# Altium PCB ESC_Brushless_V4.12.PcbDoc
Units mil, origin at the board's own origin, x right, y up, seen from the top; angles counter-clockwise.
Board outline 2120 x 1320.43 mil, 2 copper layers (Top Layer, Bottom Layer); 69 components, 46 nets, 252 pads, 156 vias.
Unrouted connection lines stored in the file: 33.
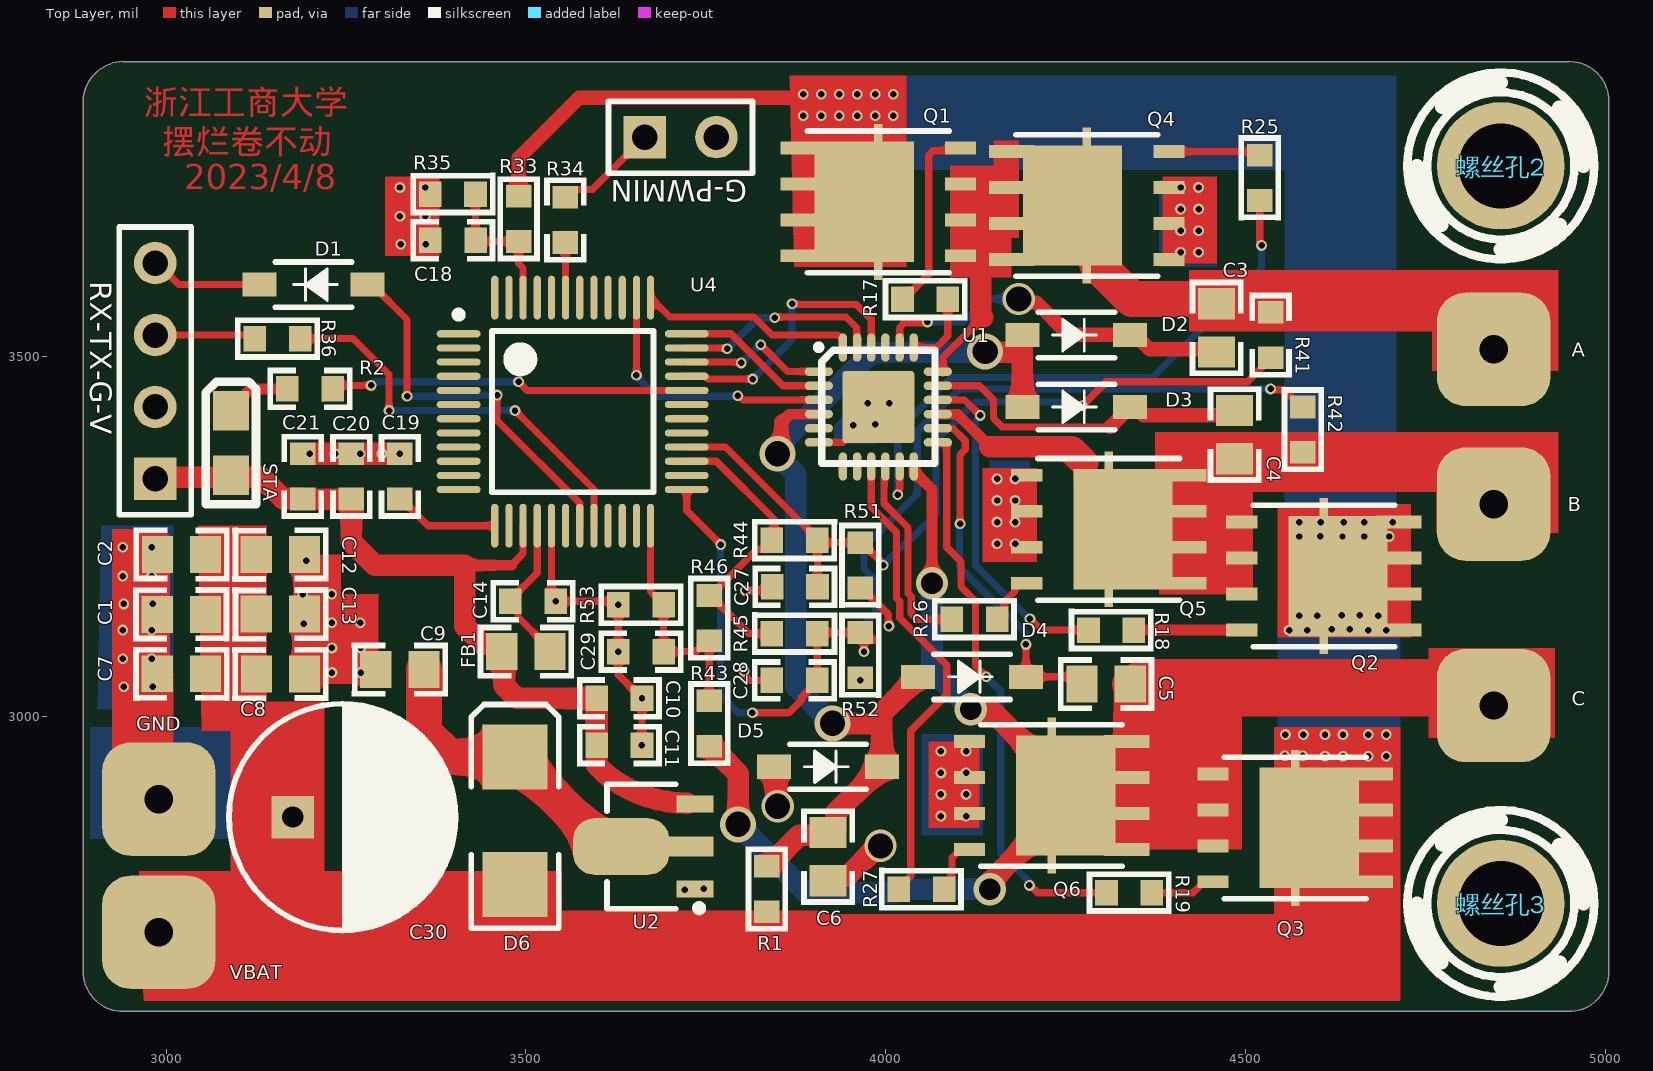
[diagram p0: Top Layer view]
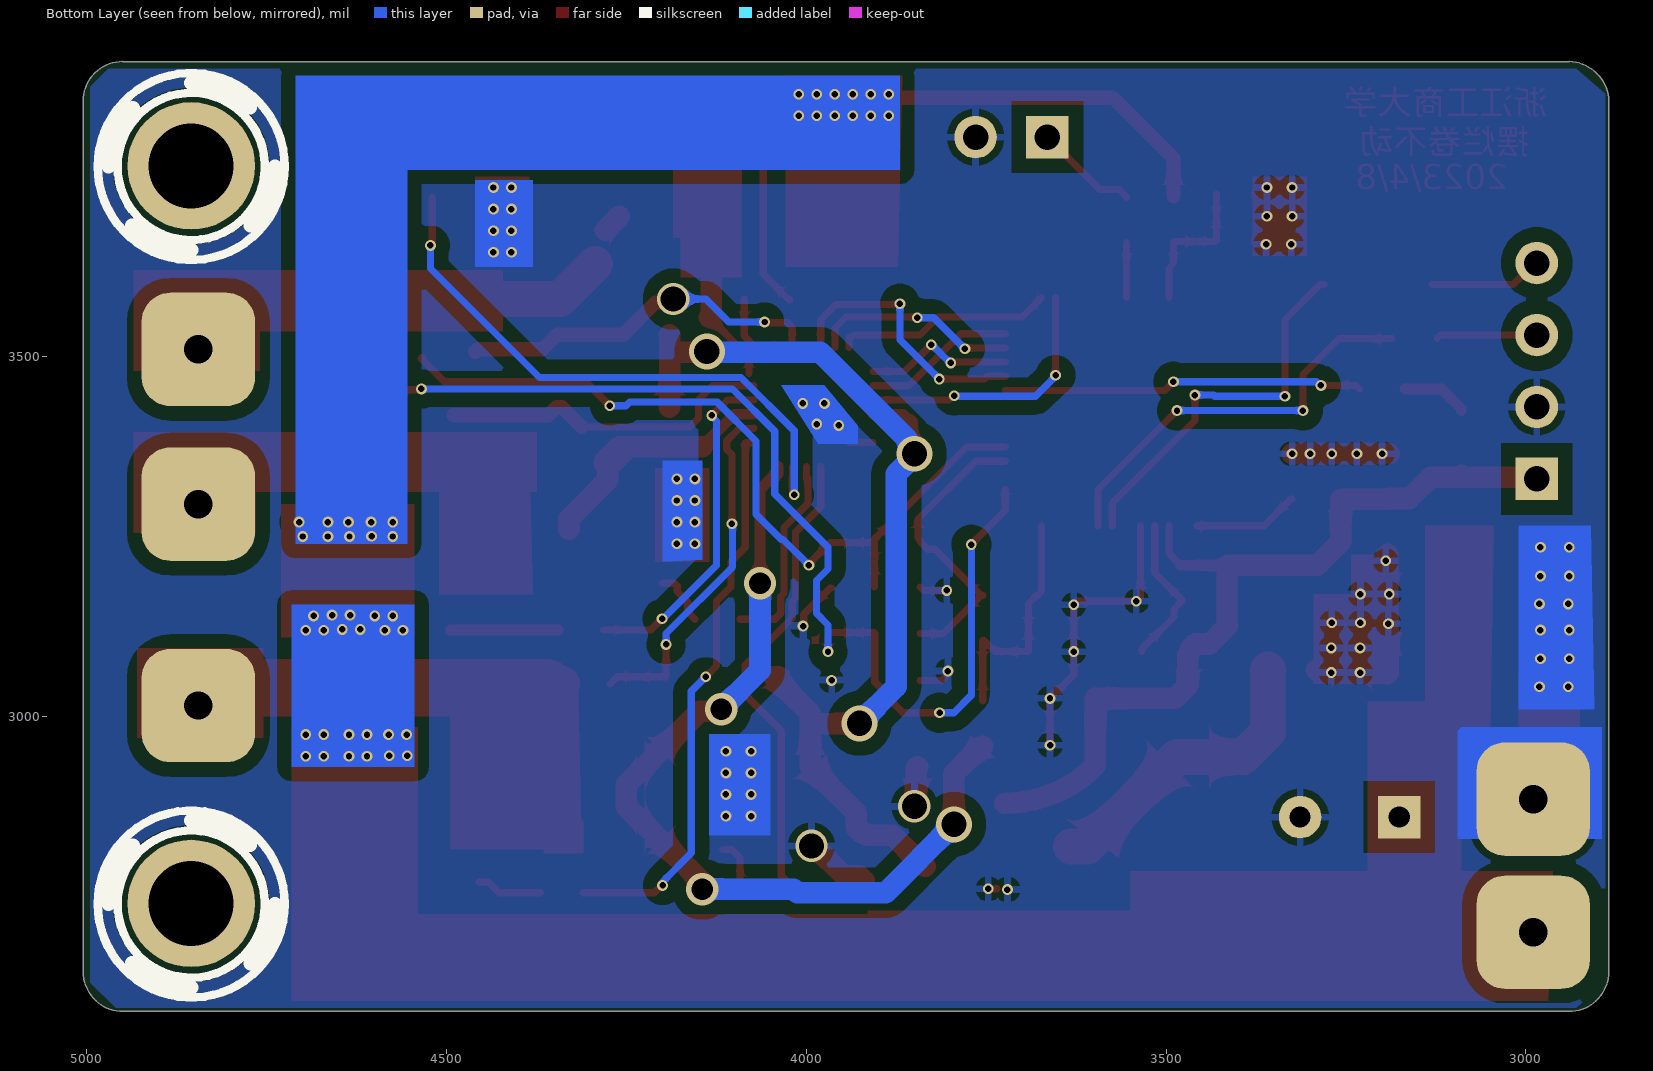
[diagram p1: Bottom Layer view, seen from below]
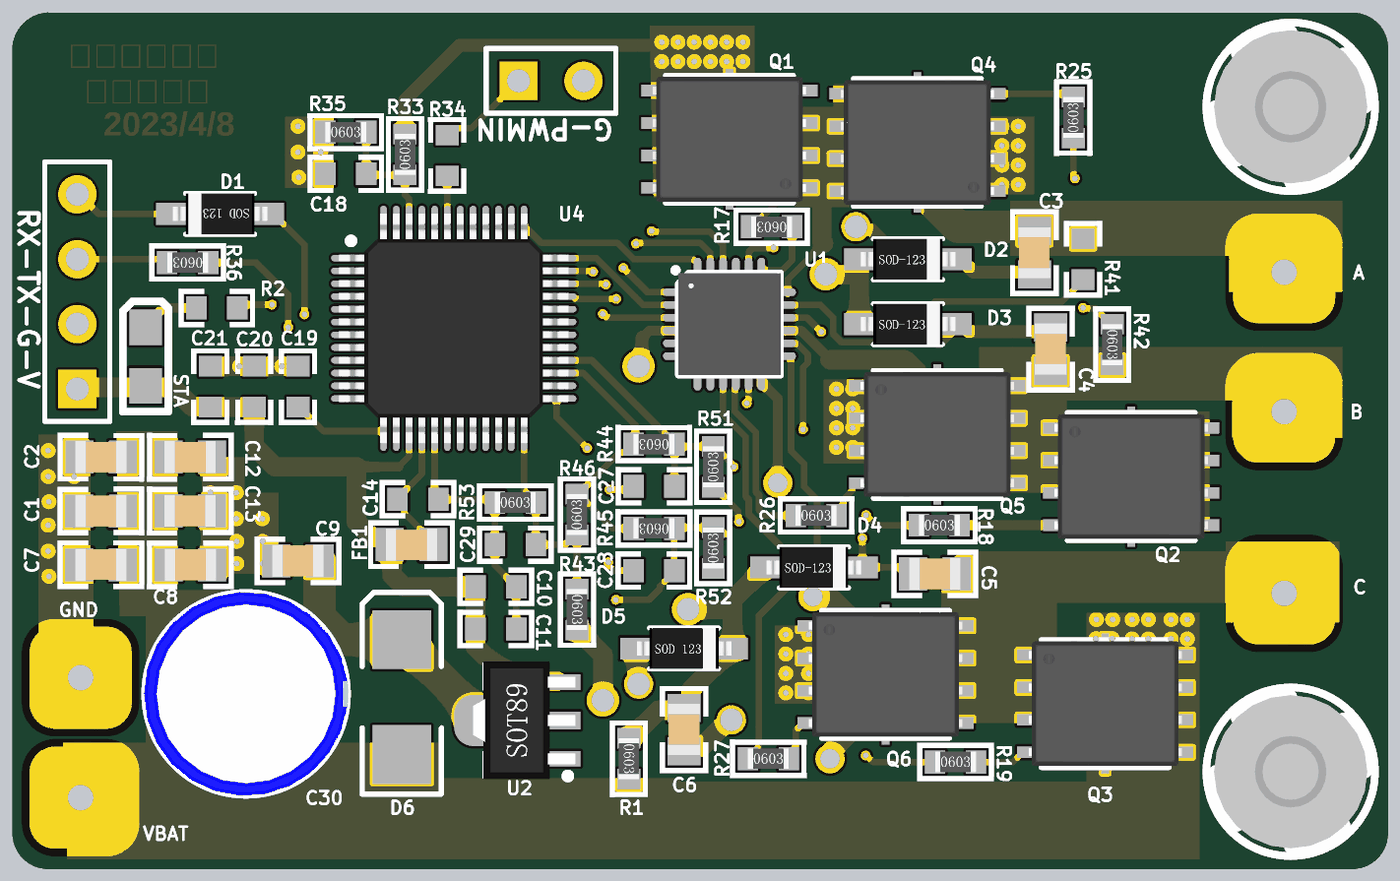
[diagram p2: 3D render of the assembled board from above, using the file's embedded part models]

## Layer stack, top to bottom
Top Solder: solder mask 0.4, Solder Resist, Dk 3.5
Top Layer: signal copper 1.4
Dielectric 1: dielectric 12.6, FR-4, Dk 4.8
Bottom Layer: signal copper 1.4
Bottom Solder: solder mask 0.4, Solder Resist, Dk 3.5

## Board outline
2885,2645 ccw(c2940,2645) 2940,2590 4950,2590 ccw(c4950,2645) 5005,2645 5005,3860 ccw(c4950,3855) 4950,3910.23 4950,3910 2940,3910 2939.98,3910.43 ccw(c2942.5,3852.5) 2885,3860

## Design rules (kind name [scope] priority, off if disabled: settings)
Clearance [All] p1: gap=6 ignorepadtopadclearanceinfootprint=TRUE
HoleSize [All] p1: absolutevalues=TRUE maxlimit=118.11 minlimit=1 maxpercent=80.000 minpercent=20.000
MinimumSolderMaskSliver [All] p1 off: minsoldermaskwidth=10
NetAntennae [All] p1 off: netantennaetolerance=0
PolygonConnect [All] p1: connectstyle=Relief reliefconductorwidth=10 reliefentries=4 polygonreliefangle="90 Angle" airgapwidth=10
RoutingVias [All] p1: holewidth=28 width=50 viastyle="Through Hole" minholewidth=28 minwidth=50 maxholewidth=28 maxwidth=50
SilkToSilkClearance [All] p1 off: silktosilkclearance=10
SilkToSolderMaskClearance [IsPad] p1 off: minsilkscreentomaskgap=10 clearancetoexposedcopper=TRUE
SolderMaskExpansion [All] p1: expansion=4 istentingtop=FALSE
Width Width_1 [InNetClass('POWER')] p1: maxlimit=100 minlimit=10 preferedwidth=30
Width [All] p2: maxlimit=50 minlimit=10 preferedwidth=10
25 further rules are at their usual default settings.

## Classes and differential pairs
net class POWER: NetC9_2 VBA VBAT VBB VBC VCC5V VCC12V VSA VSB VSC

## Components (designator, comment, footprint, x,y, rotation, side; value= is the part's Value field where it differs from the comment)
A "WirePad" WIREPAD 4845,3510 r270 top
B "WirePad" WIREPAD 4845,3295 r90 top
C "WirePad" WIREPAD 4845,3015 r90 top
C1 "22uF 25V X5R" CAPC2012[0805]S-N 3021.27,3141.68 r0 top value=22uF
C2 "22uF 25V X5R" CAPC2012[0805]S-N 3021.54,3225 r0 top value=22uF
C3 "4.7uF 25V X5R" CAPC2012[0805]S-N 4460,3540 r270 top value=4.7uF
C4 "4.7uF 25V X5R" CAPC2012[0805]S-N 4485,3391.54 r90 top value=4.7uF
C5 "4.7uF 25V X5R" CAPC2012[0805]S-N 4306.54,3045 r180 top value=4.7uF
C6 "22uF 25V X5R" CAPC2012[0805]S-N 3920,2805 r90 top value=22uF
C7 "22uF 25V X5R" CAPC2012[0805]S-N 3021.31,3059.14 r0 top value=22uF
C8 "22uF 25V X5R" CAPC2012[0805]S-N 3159.1,3058.97 r180 top value=22uF
C9 "22uF 25V X5R" CAPC2012[0805]S-N 3325,3065 r0 top value=22uF
C10 "10uF 10V X5R" CAPC1608[0603]S-N 3630,3025 r180 top value=10uF
C11 "100nF 16V X7R" CAPC1608[0603]S-N 3629.96,2960 r180 top value=100nF
C12 "22uF 25V X5R" CAPC2012[0805]S-N 3158.89,3225 r180 top value=22uF
C13 "22uF 25V X5R" CAPC2012[0805]S-N 3158.85,3142.06 r180 top value=22uF
C14 "100nF 16V X7R" CAPC1608[0603]S-N 3510,3160 r180 top value=100nF
C18 "100nF 16V X7R" CAPC1608[0603]S-N 3398.74,3661.71 r0 top value=100nF
C19 "100nF 16V X7R" CAPC1608[0603]S-N 3325,3333.54 r270 top value=100nF
C20 "10uF 10V X5R" CAPC1608[0603]S-N 3257.58,3333.5 r270 top value=10uF
C21 "100nF 16V X7R" CAPC1608[0603]S-N 3190,3333.5 r270 top value=100nF
C27 "100nF 16V X7R" CAPC1608[0603]S-N 3873.84,3180 r0 top value=100nF
C28 "100nF 16V X7R" CAPC1608[0603]S-N 3873.5,3050 r0 top value=100nF
C29 "100nF 16V X7R" CAPC1608[0603]S-N 3660.02,3090.01 r0 top value=100nF
C30 "CP2" CAP-8X9 3245,2860 r0 top value=470uF
D1 "DSK34" SOD-123 3205,3600 r180 top
D2 "DSK34" SOD-123 4265.2,3530 r0 top
D3 "DSK34" SOD-123 4265.2,3430 r0 top
D4 "DSK34" SOD-123 4120.2,3055 r0 top
D5 "BZT52C15" SOD-123 3920,2930 r0 top
D6 "DSK34" SMB 3485,2855 r90 top
FB1 "0R @100MHz 500mA" CAPC2012[0805]S-N 3500,3090 r180 top value=0R
G-PWMIN "Header 2" HDR1X2 3665,3805 r0 top (schematic designator P1)
GND "WirePad" WIREPAD 2990,2885 r270 top
Q1 "TPN2R703NL" MOS东芝 3985.32,3715 r0 top
Q2 "TPN2R703NL" MOS东芝 4613.86,3195 r180 top
Q3 "TPN2R703NL" MOS东芝 4573.86,2845 r180 top
Q4 "TPN2R703NL" MOS东芝 4275,3710 r0 top
Q5 "TPN2R703NL" MOS东芝 4315,3260 r180 top
Q6 "TPN2R703NL" MOS东芝 4235.35,2890 r180 top
R1 "100R ±1%" RESC1608[0603]S-N 3835,2760 r270 top value=100R
R2 "10K ±1%" CAPC1608[0603]S-N 3200,3455 r180 top value=10K
R17 "4.7R ±1%" RESC1608[0603]S-N 4055,3580 r180 top value=4.7R
R18 "4.7R ±1%" RESC1608[0603]S-N 4313.5,3120 r0 top value=4.7R
R19 "4.7R ±1%" RESC1608[0603]S-N 4338.5,2755 r0 top value=4.7R
R25 "4.7R ±1%" RESC1608[0603]S-N 4520,3748.5 r90 top value=4.7R
R26 "4.7R ±1%" RESC1608[0603]S-N 4123.5,3135 r0 top value=4.7R
R27 "4.7R ±1%" RESC1608[0603]S-N 4050,2760 r0 top value=4.7R
R33 "47K ±1%" RESC1608[0603]S-N 3490,3691.5 r90 top value=47K
R34 "100R ±1%" CAPC1608[0603]S-N 3555,3690 r90 top value=100R
R35 "10K ±1%" RESC1608[0603]S-N 3398.6,3725.91 r0 top value=10K
R36 "300R ±1%" RESC1608[0603]S-N 3155,3525 r180 top value=300R
R41 "5.1K ±1%" CAPC1608[0603]S-N 4535,3530 r90 top value=5.1K
R42 "5.1K ±1%" RESC1608[0603]S-N 4580,3398.5 r270 top value=5.1K
R43 "5.1K ±1%" RESC1608[0603]S-N 3755,2990 r270 top value=5.1K
R44 "1K ±1%" RESC1608[0603]S-N 3873.5,3245 r180 top value=1K
R45 "1K ±1%" RESC1608[0603]S-N 3873.5,3115 r180 top value=1K
R46 "1K ±1%" RESC1608[0603]S-N 3755,3136.5 r90 top value=1K
R51 "1K ±1%" RESC1608[0603]S-N 3965,3210 r90 top value=1K
R52 "1K ±1%" RESC1608[0603]S-N 3965,3085 r90 top value=1K
R53 "1K ±1%" RESC1608[0603]S-N 3660,3155 r0 top value=1K
RX-TX-G-V "Header-D-M 1x4P" HDR1X4 2985,3330 r90 top (schematic designator P2)
STA "蓝色贴片LED" 0805LED 3090,3335 r90 top
U1 "FD6288Q" QFN24-4x4 3990,3430 r0 top
U2 "SE8650KX-LF" SOT-89[T0243AA][SC62]-L 3664.13,2819.06 r180 top
U4 "STC32G12K128-48PIN" LQFP48_L 3565.16,3423.46 r0 top
VBAT "WirePad" WIREPAD 2990,2700 r90 top
螺丝孔2 "Scrow" LQ_SCROW3_5mm 4855,3765 r0 top
螺丝孔3 "Scrow" LQ_SCROW3_5mm 4855,2740 r0 top locked (schematic designator 螺丝孔2)

## Footprints (in the part's own frame and the unit in brackets; to place one, negate y for a bottom-side part, rotate by r counter-clockwise, add the part's x,y. Pads: shape width x height; smd on the part's side, far side on the other; paste and mask are expansions set on the pad)
0805LED [mil]
  rect 55x50 smd: A(0,0) C(90,0)
  silkscreen extent -40,-35 130,35
CAP-8X9 [mm]
  rect 1.5x1.5 hole 0.75: 1(-1.75,0)
  round 1.5 hole 0.75: 2(1.75,0)
  silkscreen extent -4,-4 4,4, body extent -4,-4 4,4, height 9.8
CAPC1608[0603]S-N [mm] "0603贴片电容 有丝印 2脚 1.60x0.80mm IPC中密度"
  rect 0.8x0.9 smd: 1(-0.8,0) 2(0.8,0)
  silkscreen extent -1.5,-0.75 1.5,0.75, body extent -0.8,-0.41 0.8,0.41, height 0.79
CAPC2012[0805]S-N [mm] "0805贴片电容 有丝印 2脚 2.00x1.20mm IPC中密度"
  rect 1.1x1.3 smd: 1(-0.85,0) 2(0.85,0)
  silkscreen extent -1.7,-0.95 1.7,0.96, body extent -1,-0.63 1,0.62, height 1.25
HDR1X2 [mm] "Connector; Header; 2 Position"
  rect 1.5x1.5 hole 0.9: 1(0,0)
  round 1.5 hole 0.9: 2(2.54,0)
  silkscreen extent -1.27,-1.27 3.81,1.27
HDR1X4 [mm] "Connector; Header; 4 Position"
  rect 1.5x1.5 hole 0.9: 1(0,0)
  round 1.5 hole 0.9: 2(2.54,0) 3(5.08,0) 4(7.62,0)
  silkscreen extent -1.27,-1.27 8.89,1.27
LQ_SCROW3_5mm [mm]
  round 4.5 hole 3: 1(0,0)
  silkscreen extent -3.3,-3.3 3.3,3.3, body extent -3,-3 3,3, height 1.3
LQFP48_L [mm] "Thin QFP, 48-Leads, Body 7x7mm, Pitch 0.5mm, IPC High Density"
  oval 1.55x0.254 smd: 1(-4.025,2.75) 2(-4.025,2.25) 3(-4.025,1.75) 4(-4.025,1.25) 5(-4.025,0.75) 6(-4.025,0.25) 7(-4.025,-0.25) 8(-4.025,-0.75) 9(-4.025,-1.25) 10(-4.025,-1.75) 11(-4.025,-2.25) 12(-4.025,-2.75) 25(4.025,-2.75) 26(4.025,-2.25) 27(4.025,-1.75) 28(4.025,-1.25) 29(4.025,-0.75) 30(4.025,-0.25) 31(4.025,0.25) 32(4.025,0.75) 33(4.025,1.25) 34(4.025,1.75) 35(4.025,2.25) 36(4.025,2.75)
  oval 0.254x1.55 smd: 13(-2.75,-4.025) 14(-2.25,-4.025) 15(-1.75,-4.025) 16(-1.25,-4.025) 17(-0.75,-4.025) 18(-0.25,-4.025) 19(0.25,-4.025) 20(0.75,-4.025) 21(1.25,-4.025) 22(1.75,-4.025) 23(2.25,-4.025) 24(2.75,-4.025) 37(2.75,4.025) 38(2.25,4.025) 39(1.75,4.025) 40(1.25,4.025) 41(0.75,4.025) 42(0.25,4.025) 43(-0.25,4.025) 44(-0.75,4.025) 45(-1.25,4.025) 46(-1.75,4.025) 47(-2.25,4.025) 48(-2.75,4.025)
  silkscreen extent -4.15,-2.85 2.85,3.55, body extent -4.5,-4.5 4.5,4.5, height 1.6
MOS东芝 [mm] "蔡老师钦定"
  rect 1.6x0.45 smd: 1(-2.531,-1.905) 1(-2.531,-0.635) 1(-2.531,0.635) 1(-2.531,1.905)
  rect 3.5x4.25 smd: 1(-0.381,0)
  rect 0.3x5.5 smd: 1(0.119,0)
  rect 1.1x0.45 smd: 2(3.019,1.905) 3(3.019,-1.905) 3(3.019,-0.635) 3(3.019,0.635)
  silkscreen extent -2.38,-2.5 2.62,2.5, body extent -2.88,-2.45 3.12,2.45, height 1
QFN24-4x4 [mm]
  rrect10% 2.55x2.55 smd: 0(0,0)
  oval 1x0.3 smd: 1(-2.1,1.25) 2(-2.1,0.75) 3(-2.1,0.25) 4(-2.1,-0.25) 5(-2.1,-0.75) 6(-2.1,-1.25) 13(2.1,-1.25) 14(2.1,-0.75) 15(2.1,-0.25) 16(2.1,0.25) 17(2.1,0.75) 18(2.1,1.25)
  oval 0.3x1 smd: 7(-1.25,-2.1) 8(-0.75,-2.1) 9(-0.25,-2.1) 10(0.25,-2.1) 11(0.75,-2.1) 12(1.25,-2.1) 19(1.25,2.1) 20(0.75,2.1) 21(0.25,2.1) 22(-0.25,2.1) 23(-0.75,2.1) 24(-1.25,2.1)
  silkscreen extent -2.21,-2 2,2.21, body extent -2,-2 2,2, height 0.9
RESC1608[0603]S-N [mm] "0603贴片电阻 有丝印 2脚 1.60x0.80mm IPC中密度"
  rect 0.8x0.9 smd: 1(-0.8,0) 2(0.8,0)
  silkscreen extent -1.5,-0.75 1.5,0.75, body extent -0.8,-0.4 0.8,0.4, height 0.45
SMB [mm] "DO-214-AA/SMB; 2 C-Bend Leads; Body 5.3 x 3.6 mm, inc. leads (LxW)"
  rect 2.3x2.3 smd: A(-2.25,0) K(2.25,0)
  silkscreen extent -3.8,-1.55 4.1,1.55
SOD-123 [mm]
  rect 1.2x0.85 smd: A(-1.9,0) K(1.9,0)
  silkscreen extent -1.35,-0.8 1.35,0.8, body extent -1.85,-0.8 1.85,0.8, height 1.2
SOT-89[T0243AA][SC62]-L [mm] "SOT89, T0243AA,SC62,3-Leads, Body 4.5x2.4 mm, Pitch 1.5mm, Lead Span 4.1mm, IPC Low Density"
  rect 1.3x0.6 smd: 1(-1.8,1.5) 3(-1.8,-1.5)
  rect 1.7x0.7 smd: 2(-1.6,0)
  rrect75% 3.4x2 smd: 2(0.8,0)
  silkscreen extent -2.08,-2.2 1.3,2.3, body extent -2.24,-2.3 1.76,2.3, height 1.6
WIREPAD [mm]
  rrect50% 4x4 hole 1 mask+0.3: 1(0,0)

## Part data
A B C GND VBAT: "线缆焊盘"
C1 C2 C6 C7 C8 C9 C12 C13: library part "22uF 0805 25V X5R", "贴片瓷片电容; MLCC; 0805(2012);", Voltage=25V, Revision=V1.0, Type=X5R
C3 C4 C5: library part "4.7uF 0805 25V X5R", "贴片瓷片电容; MLCC; 0805(2012);", Voltage=25V, Revision=V1.0, Type=X5R
C10 C20: library part "10uF 0603 16V X5R", "贴片瓷片电容; MLCC; 0603(1608);", Voltage=10V, Revision=V1.0, Type=X5R
C11 C14 C18 C19 C21 C27 C28 C29: library part "100nF 0402 16V X7R", "贴片瓷片电容; MLCC; 0402(1005);", Voltage=16V, Revision=V1.0, Type=X7R
C30: library part "Cap Pol2", "Polarized Capacitor (Axial)", LatestRevisionDate=17-Jul-2002, LatestRevisionNote="Re-released for DXP Platform.", PackageDescription="Polarized Capacitor; 2 Leads", PackageReference=POLAR0.8, Published=8-Jun-2000, Publisher="Altium Limited"
D1 D2 D3 D4 D6: library part "Diode Schottky", "肖特基二极管 Diode", Imax=500mA, Price(RMB)=0.000, Published=8-Jun-2000, Publisher="Altium Limited", Revision="July-2002: Re-released for DXP Platform."
D5: library part "Diode Zen", "稳压二极管 齐纳二极管  Zener Diode", Price(RMB)=0.000, Published=8-Jun-2000, Publisher="Altium Limited", Revision="July-2002: Re-released for DXP Platform."
FB1: library part FB-Chip, "贴片磁珠", Frequency=@100MHz, DCR=.1m, Imax=500mA, Published=2020-12-18, Revision=V1.0
G-PWMIN: "Header, 2-Pin", LatestRevisionDate=17-Jul-2002, LatestRevisionNote="Re-released for DXP Platform.", Publisher="Altium Limited"
Q1 Q2 Q3 Q4 Q5 Q6: "东芝 N沟 MOS"
R1 R34: library part Res-Chip_2, "贴片电阻", Power=1/8W, Tolerance=±1%, Revision=V1.0
R2 R35 R36: library part Res-Chip_4, "贴片电阻", Power=1/8W, Tolerance=±1%, Revision=V1.0
R17 R18 R19 R25 R26 R27: library part Res-Chip_5, "贴片电阻", Power=1/8W, Tolerance=±1%, Revision=V1.0
R33: library part Res-Chip_3, "贴片电阻", Power=1/8W, Tolerance=±1%, Revision=V1.0
R41 R42 R43: library part Res-Chip, "贴片电阻", Power=1/8W, Tolerance=±1%, Revision=V1.0
R44 R45 R46 R51 R52 R53: library part Res-Chip_1, "贴片电阻", Power=1/8W, Tolerance=±1%, Revision=V1.0
RX-TX-G-V: "1x4pin, 直插, 排针", Revision=V1.0
STA: library part "LED Chip Blue", Color=Blue, Price(RMB)=0.00, Published=8-Jun-2000, Publisher="Altium Limited", Revision="July-2002: Re-released for DXP Platform."
U1: "FD6288Q 三相栅极驱动器"
U2: library part SE86XXKX-LF, "SE86XX 线性稳压器"
U4: "STC32G12K128 LQFP48"

## Via types
v1: diameter 15, hole 9, Top Layer to Bottom Layer, 146 vias
v2: diameter 50, hole 35, Top Layer to Bottom Layer, 4 vias
v3: diameter 45, hole 35, Top Layer to Bottom Layer, 3 vias
v4: diameter 45, hole 30, Top Layer to Bottom Layer, 3 vias

## Nets (pads, with @x,y where several pads share a name; then routed paths per layer and width w, separated by ;. In a path a pad name is that pad's centre, name@x,y a point inside that pad or via, vN(x,y) a via of type N, cw(c..) or ccw(c..) an arc to the next point about the centre after c; other vN are vias at no path point)
ABMF: C27.2 R41.1 R44.1 R51.2 U4.28 | length 1131.4
  Top Layer w10: U4.28 3777.72,3374.25 3894.25,3257.72 3905,3246.97 R44.1 R44.1@3905.33,3244.67 ; C27.2 R44.1@3905.33,3244.67 ; v1(3996.5,3210) 3995.54,3210.96 3995.54,3212.92 3966.97,3241.5 R51.2 3908.5,3241.5 R44.1@3905.33,3244.67 ; v1(4273.3,3431.7) 4306.6,3465 4503.02,3465 R41.1@4535.27,3497.25 ; R41.1@4533.03,3498.5 R41.1
  Bottom Layer w10: v1(3996.5,3210) 4032.46,3245.96 4035,3245.96 4070,3280.96 4070,3382.86 4123.84,3436.7 4245.8,3436.7 4250.8,3431.7 v1(4273.3,3431.7)
BATADC: C18.2 R33.1 R35.2 U4.46 | length 205.4
  Top Layer w10: R35.2 3430.1,3661.85 C18.2 3431.94,3660 R33.1 3490,3629.25 3496.26,3622.99 U4.46
BBMF: C28.2 R42.1 R45.1 R52.2 U4.25 | length 1547.2
  Top Layer w10: U4.25 3723.62,3286.01 v1(3770.79,3238.84) ; v1(3815,3005) 3865.83,3005 3882.76,3021.93 3882.76,3025.79 3905,3048.03 C28.2 R45.1 3906.5,3116.5 R52.2 3965.33,3116.5 3970,3111.83 v1(3970,3090) ; v1(4535,3455) 4535.96,3454.04 4553.99,3454.04 4578.03,3430 R42.1
  Bottom Layer w10: v1(3770.79,3238.84) 3770.79,3029.21 3795,3005 v1(3815,3005) ; v1(3970,3090) 3970,3127.16 3986.16,3143.31 3986.16,3188.84 3970,3205 3970,3235 4044,3309 4044,3396.35 4102.65,3455 4420,3455 v1(4535,3455)
CBMF: C29.2 R43.1 R46.1 R53.2 U4.24 | length 336.5
  Top Layer w10: U4.24 3673.43,3173.57 3679.28,3167.72 3680.75,3167.72 3691.5,3156.97 R53.2 C29.2 3738.04,3090.01 3753.03,3105 R46.1 R43.1
CMPO: U4.23
DBRX: D1.A U4.19 | length 536.7
  Top Layer w10: D1.A 3286.69,3600 3335,3551.69 v1(3335,3445) ; v1(3460,3446.5) 3460,3411.38 3575,3296.38 U4.19
  Bottom Layer w10: v1(3335,3445) 3432.5,3445 3434,3446.5 v1(3460,3446.5)
DBTX: R36.1 U4.20 | length 574.6
  Top Layer w10: R36.1 3260,3525 3310,3475 v1(3310,3425) ; v1(3485,3425) 3594.68,3315.32 U4.20
  Bottom Layer w10: v1(3310,3425) v1(3485,3425)
GND: C1.1 C2.1 C6.1 C7.1 C8.1 C9.1 C10.1 C11.1 C12.1 C13.1 C14.1 C18.1 C19.1 C20.1 C21.1 C27.1 C28.1 C29.1 C30.2 D5.A G-PWMIN.2 GND.1 Q4.3 Q5.3 Q6.3 R35.1 R51.1 R52.1 R53.1 RX-TX-G-V.2 U1.0 U1.6 U2.1 U4.17 | length 1329.8
  Top Layer w10: U4.17 3535.63,3165.87 v1(3541.5,3160) 3623.5,3160 v1(3628.5,3155) ; v1(3628.5,3155) v1(3628.53,3090.01) 3628.53,3057.97 3648.78,3037.72 3650.75,3037.72 3661.5,3026.97 v1(3661.5,3025) v1(3661.46,2960) v1(3661.46,2960) ; U2.1 3735.31,2760.31 v1(3747.19,2760.31) ; v1(3803.29,3062.95) 3804.25,3061.99 3804.25,3057.21 3811.46,3050 C28.1 ; v1(3805,3175) 3837.34,3175 C27.1 ; U1.6 3940.78,3380.79 3985.73,3425.74 v1(3985.73,3406.3) ; R51.1 3966.97,3178.5 4003.7,3141.77 4003.7,3126.44 v1(4004.66,3125.48) ; v1(3975,3435) 3980,3430 U1.0 ; U1.0@3985.73,3430 U1.0 ; v1(4005,3435) 4000,3430 U1.0 ; v1(4111.87,2861.5) 4113,2861.5 Q6.3@4116.5,2865 ; v1(4111.87,2921.5) 4111.87,2918.86 4115.73,2915 Q6.3@4116.5,2915 ; Q4.3@4393.86,3735 4401.14,3735 4405,3731.14 4405,3725.57
  Top Layer w30: C21.1 v1(3325,3365.03) ; v1(3195,3216.17) 3195,3222.35 C12.1 3192.35,3214.52 3192.46,3214.41 3192.46,3170 3191.25,3168.79 3191.25,3138.47 3192.46,3137.26 3192.46,3132.46 3190,3130 v1(3191.25,3128.75) 3191.25,3060.29 C8.1 3195.58,3061.99 3288.52,3061.99 C9.1 ; R35.1 R35.1@3367.17,3725.84 ; C18.1@3367.17,3661.78 C18.1 ; D5.A 3845.87,2930 3847.6,2928.27 3847.6,2877.4 v3(3850,2875) ; C6.1 3926.65,2778.19 3947.1,2778.19 3988.91,2820 v3(3992.97,2820)
  other v1: 3720.62,2759.38 4076.87,2861.5 4076.87,2891.5 4111.87,2891.5 4076.87,2921.5 4076.87,2951.5 4111.87,2951.5 2941.25,3041.25 2981.25,3041.25 3965,3050 3230.62,3060.91 3270.62,3060.91 2940,3080 2980,3080 3230.62,3095.14 3270.62,3095.14 2940,3120 2980,3120 3230,3130 3270,3130 2941.25,3156.25 2981.25,3156.25 3190,3170 3230,3170 2940,3195 2980,3195 2940,3235 2980,3235 4155,3240 4180,3240 4155,3270 4180,3270 4155,3300 4180,3300 4155,3330 4180,3330 3200,3365 3235,3365 3270,3365 3300,3365 3955.07,3404.45 4410,3645 4435,3645 3326.25,3656.25 3361.25,3656.25 4410,3675 4435,3675 3325,3695 3360,3695 4410,3705 4435,3705 3325,3735 3360,3735 4410,3735 4435,3735
HOA: R17.1 U1.19 | length 105.3
  Top Layer w10: U1.19 4070.62,3512.68 4086.5,3528.56 R17.1
HOB: R18.1 U1.16 | length 473
  Top Layer w10: U1.16 4109.86,3439.84 v1(4131.5,3418.2) ; v1(4200.58,3135.58) 4200.77,3135.58 4216.35,3120 R18.1
  Bottom Layer w10: v1(4131.5,3418.2) 4131.5,3416.85 4125,3410.35 4125,3210 4199.42,3135.58 v1(4200.58,3135.58)
HOC: R19.1 U1.13 | length 784.9
  Top Layer w10: U1.13 4084.16,3380.79 4085,3379.95 4085,3235 4105,3215 4105,3180.07 4125.14,3159.93 4125.14,3069.86 v1(4140,3055) ; v1(4200,2765) 4201.35,2765 4211.35,2755 R19.1@4310.51,2755
  Bottom Layer w10: v1(4140,3055) 4160,3035 4160,2810 v1@4200,2770
LED: R2.1 U4.32 | length 501.2
  Top Layer w10: R2.1 3236.5,3460 v1(3285,3460) ; v1(3490,3465) 3502.01,3452.99 U4.32
  Bottom Layer w10: v1(3285,3460) 3286.35,3460 3291.35,3465 v1(3490,3465)
LOA: R25.1 U1.11 | length 828.1
  Top Layer w10: v1(4016.82,3307.99) 4016.82,3309.34 4019.53,3312.04 U1.11 ; R25.1@4520,3721.07 4520,3658.38 4522.5,3655.88 v1(4522.5,3654.53)
  Bottom Layer w10: v1(4016.82,3307.99) 4016.82,3396.82 4091,3471 4371,3471 4522.5,3622.5 v1(4522.5,3654.53)
LOB: R26.1 U1.10 | length 280.2
  Top Layer w10: U1.10 3999.84,3333.05 3998,3331.21 3998,3295.59 4031,3262.59 4031,3171.12 4035.7,3166.42 4035.7,3143.23 4043.93,3135 R26.1
LOC: R27.1 U1.9 | length 658.3
  Top Layer w10: U1.9 3980.16,3290.8 4015,3255.96 4015,3164.5 4019.7,3159.79 4019.7,3136.6 4085,3071.3 4085,3030 4035,2980 4035,2778.46 4018.5,2761.97 R27.1
MID: R44.2 R45.2 R46.2 U4.27 | length 412.1
  Top Layer w10: U4.27 3764.58,3354.57 3845,3274.14 3845,3247.99 R44.2 3842.01,3243.03 3831.26,3232.28 3821.26,3232.28 R46.2@3756.97,3167.99 ; R46.2 R46.2@3756.97,3167.99 ; R45.2 3809.96,3115 R46.2@3756.97,3167.99
NetC9_2: C9.2 D6.K U2.2 | length 426.7
  Top Layer w50: C9.2 3358.46,2978.46 3393.35,2943.58 D6.K 3609.53,2819.06 U2.2@3632.64,2819.06
NetC14_2: C14.2 FB1.1 U4.16 | length 213.5
  Top Layer w10: U4.16 3515.94,3220.82 3516,3220.77 3516,3199.23 3500.77,3184 3500.54,3184 3478.5,3161.97 C14.2 3489.25,3149.25 3489.25,3138.15 3533.46,3093.94 FB1.1
NetD1_K: D1.K RX-TX-G-V.4 | length 157.6
  Top Layer w10: RX-TX-G-V.4 2987.97,3630 3017.97,3600 D1.K
NetP1_1: G-PWMIN.1 R34.2 | length 144.6
  Top Layer w10: R34.2 3565.75,3732.24 3592.24,3732.24 G-PWMIN.1
NetP2_3: R36.2 RX-TX-G-V.3 | length 140.6
  Top Layer w10: RX-TX-G-V.3 3118.5,3530 R36.2
NetQ1_2: Q1.2 R17.2 | length 267.5
  Top Layer w10: R17.2 4023.5,3578.03 4060,3614.53 4060,3780.28 4065.86,3786.14 4100.32,3786.14 Q1.2
NetQ2_2: Q2.2 R18.2 | length 150
  Top Layer w15: R18.2 4430,3120 Q2.2
NetQ3_2: Q3.2 R19.2 | length 91.2
  Top Layer w10: R19.2 4427.2,2755 4442.2,2770 Q3.2
NetQ4_2: Q4.2 R25.2 | length 128.6
  Top Layer w10: Q4.2 R25.2@4522.45,3785
NetQ5_2: Q5.2 R26.2 | length 78.4
  Top Layer w10: R26.2 4165.27,3145.27 4165.27,3159.41 4179.49,3173.63 4179.49,3181.14 4183.35,3185 Q5.2@4200,3185
NetQ6_2: Q6.2 R27.2 | length 77
  Top Layer w10: R27.2 4092.24,2770.75 4092.24,2803.54 4103.7,2815 Q6.2
NetR2_2: R2.2 STA.C | length 92.4
  Top Layer w15: STA.C 3090,3427.5 3117.5,3455 R2.2
P1.0: U4.5
PWMAH: U1.22 U4.33 | length 378.9
  Top Layer w10: U4.33 3749.13,3472.68 3752.97,3468.84 v1(3815.49,3468.84) ; v1(3870,3573.5) 3870.92,3572.58 3959.32,3572.58 3980.16,3551.74 U1.22
  Bottom Layer w10: v1(3815.49,3468.84) 3839.04,3492.4 3870,3523.35 v1(3870,3573.5)
PWMAL: U1.1 U4.34 | length 210.1
  Top Layer w10: U4.34 3796.96,3492.36 3798.14,3491.18 v1(3799.5,3491.18) ; v1(3826.5,3516.5) 3863.79,3479.21 U1.1
  Bottom Layer w10: v1(3799.5,3491.18) 3800.34,3491.18 3825.66,3516.5 v1(3826.5,3516.5)
PWMBH: U1.23 U4.35 | length 288.9
  Top Layer w10: U4.35 3777.27,3512.05 3778.46,3510.86 v1(3779.81,3510.86) ; v1(3845.92,3554.08) 3846.85,3555 3945,3555 3960.13,3539.87 3960.13,3513.02 U1.23
  Bottom Layer w10: v1(3779.81,3510.86) 3823.03,3554.08 v1(3845.92,3554.08)
PWMBL: U1.2 U4.36 | length 213.6
  Top Layer w10: U4.36 3785.11,3531.73 3805.3,3511.53 3857.31,3459.53 U1.2
PWMCH: U1.24 U4.37 | length 303.8
  Top Layer w10: U4.37 3700.35,3555 3817.33,3555 3842.33,3530 3934.02,3530 3937.22,3526.8 3939.95,3526.8 3940.79,3525.97 U1.24
PWMCL: U1.3 U4.38 | length 377.1
  Top Layer w10: v1(3653.74,3474.11) U4.38 ; v1(3794.57,3445.74) 3795.93,3445.74 3801.82,3439.84 U1.3
  Bottom Layer w10: v1(3653.74,3474.11) 3653.74,3472.75 3681.65,3444.84 3793.68,3444.84 v1(3794.57,3445.74)
PWMIN: R34.1 U4.43 | length 76.7
  Top Layer w10: R34.1 3555,3607.76 3555.31,3607.44 U4.43
UCAP: C19.2 U4.13 | length 147.2
  Top Layer w10: C19.2 3326.97,3302.04 3364.01,3265 U4.13
VBA: C3.2 D2.K U1.20 | length 515.3
  Top Layer w10: U1.20 4019.87,3513.02 4019.87,3541.27 4025.73,3547.13 4057.13,3547.13 v1(4058.09,3548.09)
  Top Layer w20: v3(4185,3580) 4189.78,3575.22 4209.78,3575.22 4254.66,3530.34 4346.55,3530.34 4366.89,3510 4456.54,3510 C3.2
  Bottom Layer w10: v1(4058.09,3548.09) 4108.09,3548.09 4140,3580 v3(4185,3580)
VBAT: C1.2 C2.2 C7.2 C8.2 C12.2 C13.2 C30.1 D6.A Q1.1 Q2.1 Q3.1 R1.2 R33.2 VBAT.1 | length 881.1
  Top Layer w20: R33.2@3489.9,3723.1 3489.9,3775.71 3574.19,3860 3870.12,3860
  Top Layer w30: v1(4575,3270) 4575,3256.58 Q2.1@4600.08,3231.5 ; v1(4605,3270) 4605,3231.5 4605,3199.17 Q2.1@4609.17,3195 ; Q2.1@4628.86,3225.57 4628.86,3214.43 4628.86,3195 4628.86,3195.71 Q2.1@4659.07,3225.93 ; v1(4635,3250) 4628.86,3243.86 4628.86,3259.16 4636.42,3266.72 v1(4636.42,3270) v1(4665,3270) 4655,3260 4640,3245 Q2.1@4640,3225.57 ; Q2.1@4650,3235 v1(4665,3250) ; Q2.1@4674.07,3240.93 4703.15,3270 Q2.1@4713.5,3270
  Top Layer w50: Q2.1@4609.17,3195 Q2.1@4628.86,3195
  other v1: 4554.88,2945.14 4579.88,2945.14 4610.7,2944.66 4635.7,2944.66 4670.7,2944.66 4695.7,2944.66 4555.7,2974.66 4580.7,2974.66 4610.7,2974.66 4635.7,2974.66 4670.7,2974.66 4695.7,2974.66 4560.7,3119.66 4585.7,3119.66 4670.7,3119.66 4695.7,3119.66 4620.05,3120.87 4645.05,3120.87 4574.87,3139.66 4599.87,3139.66 4684.87,3139.66 4634.22,3140.87 4659.22,3140.87 4575,3250 4604.3,3250.34 4700,3250 4705,3270 3885.7,3834.66 3910.7,3834.66 3935.7,3834.66 3960.7,3834.66 3985.7,3834.66 4010.7,3834.66 3885.7,3864.66 3910.7,3864.66 3935.7,3864.66 3960.7,3864.66 3985.7,3864.66 4010.7,3864.66
VBB: C4.2 D3.K U1.17 | length 472.3
  Top Layer w10: U1.17 4130.47,3459.53 4150,3440 4150,3414.48 4162.22,3402.27 4312.27,3402.27
  Top Layer w20: 4312.27,3402.27 D3.K 4346.89,3430 4358.43,3418.46 C4.2@4490,3418.46
VBC: C5.2 D4.K U1.14 | length 497.2
  Top Layer w10: U1.14 4073.02,3400.13 4093.71,3400.13 4110.71,3383.12 4110.71,3370.71 4103.5,3363.5 v1(4103.5,3267.61) ; v1(4195,3100) D4.K 4263.07,3055 C5.2
  Bottom Layer w10: v1(4103.5,3267.61) 4102.54,3266.65 4102.54,3207.46 4195,3115 v1(4195,3100)
VCC5V: C10.2 C11.2 C20.2 C21.2 FB1.2 RX-TX-G-V.1 STA.A U2.3 U4.15 | length 1213.1
  Top Layer w10: 3480,3210 3496.26,3226.26 U4.15
  Top Layer w15: 3415,3210 3480,3210
  Top Layer w30: RX-TX-G-V.1 2987.5,3332.5 STA.A@3087.5,3332.5 ; STA.A STA.A@3087.5,3332.5 ; FB1.2 3466.54,3093.94 3459.88,3100.59 3439.41,3100.59 3415,3125 3415,3210 3290,3210 3257.58,3242.42 C20.2 C21.2 3189.25,3302.76 3162.24,3302.76 3132.5,3332.5 STA.A@3087.5,3332.5 ; FB1.2@3470.01,3086.52 3470.01,3042.59 3487.59,3025.02 C10.2@3597.76,3025.02 ; C10.2@3597.78,3025 C10.2 C11.2 ; C11.2 3598.47,2957.28 3598.47,2932.27 3607.25,2923.49 3608.07,2922.67 ccw(c3724.41,3057.54) U2.3@3724.41,2879.43
VCC12V: C6.2 D2.A D3.A D4.A D5.K R1.1 U1.4 | length 1462.8
  Top Layer w15: 3856.32,3410 3866.19,3419.88 3907.04,3419.88 U1.4
  Top Layer w20: v2(3850,3365) 3855.21,3370.21 3855.21,3408.89 3856.32,3410
  Top Layer w30: R1.1 3835.75,2792.24 3837.72,2792.24 3880.14,2834.67 3916.21,2834.67 C6.2 ; C6.2@3923.94,2838.46 3930.59,2845.12 3930.59,2865.79 3986.18,2921.38 3986.18,2928.27 3987.91,2930 D5.K 3994.8,3004.41 4011.58,3021.19 4036.77,3046.38 4036.77,3053.27 4038.5,3055 D4.A ; v2(3926.14,2990.34) 3926.48,2990 3994.8,2990 ; v2(4138.51,3507) 4139.51,3506 4190.2,3506 ; D3.A 4190.2,3430.2 4190.2,3484.8 4190,3485 4190.2,3485.2 4190.2,3506 ; D2.A 4190.2,3529.8 4190.2,3506
  Bottom Layer w30: v2(3926.14,2990.34) 3875,3041.48 3875,3337.43 3850,3362.43 3850,3370.41 3860,3380.41 3860,3385 3981,3506 4137.51,3506 v2(4138.51,3507)
VSA: A.1 C3.1 Q1.3 Q4.1 R41.2 U1.18 | length 753.8
  Top Layer w10: U1.18@4080,3476.43 4080,3499.43 4112.78,3532.21 4135,3554.43
  Top Layer w30: 4135,3554.43 4132.5,3556.93 4132.5,3627.5 4135,3630 ; Q4.1@4259.88,3695.12 Q4.1@4279.57,3675.43
  Top Layer w50: Q4.1@4293.78,3628.52 4342.29,3580 4436.84,3580 4442.79,3574.06 4459.41,3574.06 C3.1 ; C3.1@4460,3580 4540,3580 ; R41.2@4548.5,3575 4820,3575 A.1@4825,3580
VSB: B.1 C4.1 Q2.3 Q5.1 R42.2 U1.15 | length 466.1
  Top Layer w15: U1.15 4072.96,3419.88 4100.12,3419.88 4145,3375
  Top Layer w30: 4145,3375 4253.53,3375 4258.53,3370 ; 4276.1,3352.43 4276.1,3328.66 4310.32,3294.45 4330,3274.76 Q5.1@4330,3260
  Top Layer w40: 4258.53,3370 4276.1,3352.43
  Top Layer w50: C4.1 4485.59,3358.66 4502.21,3358.66 4510.56,3367.01 R42.2 ; B.1@4830,3280 B.1
VSC: C5.1 C.1 Q3.3 Q6.1 R43.2 U1.12 | length 1735.9
  Top Layer w15: U1.12 4039.21,3336.73 4040.81,3335.14 4044.62,3335.14 4064.5,3315.26 v4(4064.5,3185)
  Top Layer w30: R43.2 3755.75,2957.76 3757.72,2957.76 3795,2920.47 v2(3795,2850) ; v4(4118.57,3010) 4121.44,3007.13 4147.99,3007.13 4250.35,2904.76 4250.35,2890 4250.35,2875.24 4147.87,2772.75 4147.87,2762.87 v4(4145,2760)
  Top Layer w50: C5.1 4340.59,3044.41 4357.21,3044.41 C5.1@4361.62,3040
  Top Layer w80: C5.1@4361.62,3040 C.1@4820,3040
  Bottom Layer w30: v2(3795,2850) 3890,2755 4012.97,2755 4017.97,2760 v4(4145,2760) ; v4(4064.5,3185) 4064.5,3064.07 v4(4118.57,3010)
pads on no net: U1.5 U1.7 U1.8 U1.21 U4.1 U4.2 U4.3 U4.4 U4.6 U4.7 U4.8 U4.9 U4.10 U4.11 U4.12 U4.14 U4.18 U4.21 U4.22 U4.26 U4.29 U4.30 U4.31 U4.39 U4.40 U4.41 U4.42 U4.44 U4.45 U4.47 U4.48 螺丝孔2.1 螺丝孔3.1

## Polygon pours and split planes (outlines as drawn)
GND on Bottom Layer "NONET_L-01_P-001" (solid, pour order 0): 2930,3900 4970,3900 4995,3875 4995,2630 4960,2595 2930,2595 2890,2635 2890,3865

## Other copper
Top Layer:
  region net VSB: 4900,3395 4900,3311.93 4375,3311.93 4375,3395
  region net GND: 2995,3260 3005,3250 3005,3025 2925,3025 2925,3260
  region net VSC: 4755,3095 4930,3095 4930,2970 4755,2970
  region net VSB: 4765,3315 4935,3315 4935,3255 4765,3255
  region net VSA: 4760,3620 4935,3620 4935,3480 4760,3480
  region net VSB: 4935,3395 4935,3280 4770,3280 4770,3395
  region net GND: 2975,3095 3010,3060 3010,2860 2925,2860 2925,3095
  region net VBAT: 2962.59,2785 3550,2785 3550,2605 2969.26,2605
  region net VBAT: 3090,3020 3220,3020 3220,2760 3090,2760
  region net VSA: 4850,3620 4850,3535 4422.32,3535 4422.32,3620
  region net VBAT: 4545,3295 4730,3295 4730,3110 4545,3110
  region net VBAT: 4540,2985 4715,2985 4715,2715 4540,2715
  region net GND: 3305,3750 3380,3750 3380,3640 3305,3640
  region net VSB: 4385,3375 4510,3375 4510,3170 4380,3170
  region net VSC: 4310,2855 4365,2855 4365,2810 4310,2810
  region net VSC: 4317.5,3050 4495,3050 4495,2815 4311.9,2815
  region net GND: 4385,3750 4460,3750 4460,3630 4385,3630
  region net VBAT: 3905,2725 4715,2725 4715,2605 3905,2605
  region net VBAT: 3480,2730 3915,2730 3915,2605 3480,2605
  region net VBAT: 3045,3265 3140,3265 3140,2980 3050,2980
  region net GND: 3181.34,3224.89 3242.5,3224.89 3242.5,3170 3178.88,3170
  region net GND: 3190,3170 3295,3170 3295,3045 3190,3045
  region net GND: 4130,2965 4130,2845 4060,2845 4060,2965
  region net GND: 4135,3345 4210,3345 4210,3215 4135,3215
  region net VBAT: 3866.86,3890 4028.86,3890 4028.86,3626.14 4030,3625 3873.02,3625
  region net VSA: 4150,3800 4185,3800 4185,3665 4150,3665
  region net VSA: 4175,3765 4175,3610 4090,3610 4090,3765
  text "浙江工商大学" at 2970,3825.06 h59.06
  text "摆烂卷不动" at 2995.04,3770.28 h59.06
  text "2023/4/8" at 3025,3720.7 h59.06
Bottom Layer:
  region net GND: 2895,2985 3090,2985 3095,2980 3095,2830 2895,2830
  region net GND: 2910,3265 3010,3265 3010,3010 2905,3010
  region net GND: 4050,2975 4135,2975 4135,2835 4050,2835
  region net GND: 4200,3215 4200,3355 4145,3355 4145,3217.96
  region net GND: 4380,3625 4460,3625 4460,3745 4380,3745
  region net GND: 3975,3460 4035,3460 3983.78,3378.78 3928.78,3378.78 3928.78,3403.86
  region net VBAT: 4710,3240 4555,3240 4555,3835 4710,3835
  region net VBAT: 4362.73,3890 4710,3890 4710,3760 3870,3760 3870,3890
  region net VBAT: 4715,3130 4715,2930 4545,2930 4545,3155 4715,3155

## Silkscreen, mask and mechanical layers (free items; w line width, h text height)
Mechanical 1:
  lines w10: 2940,3910 4950,3910 ; 2939.98,3910.43 ccw(c2942.5,3852.5) 2885,3860 2885,2645 ccw(c2940,2645) 2940,2590 4950,2590 ccw(c4950,2645) 5005,2645 5005,3860 ccw(c4950,3855) 4950,3910.23